# EAGLE board BATT_CPU_V3 (EAGLE 9.6.2)
REV: C
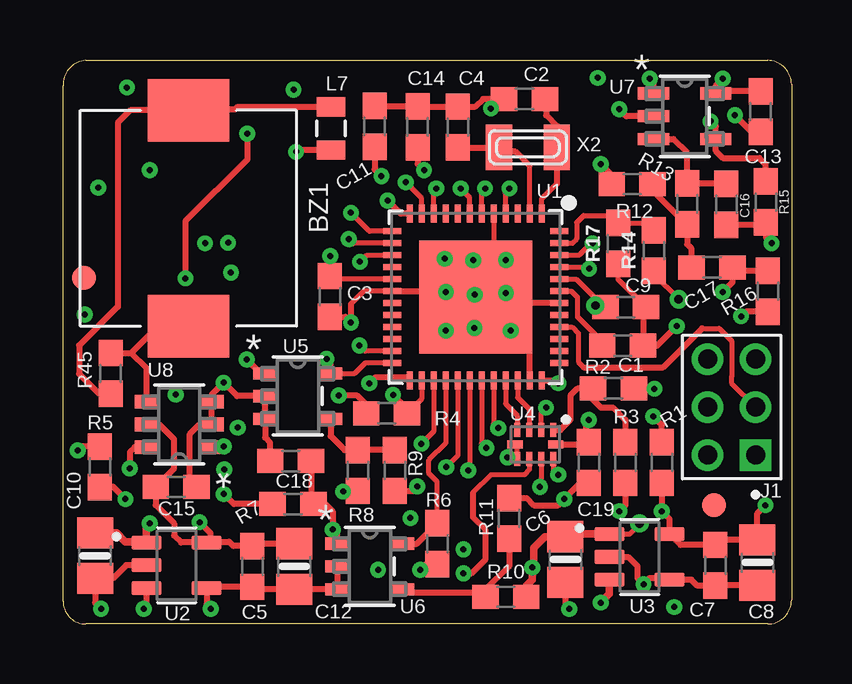
[diagram p0: board, top side]
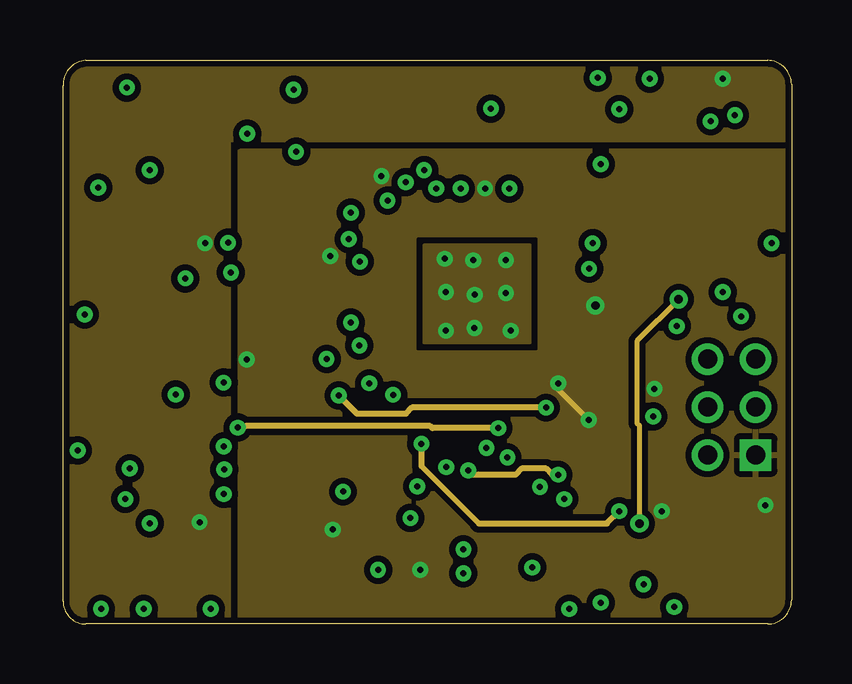
[diagram p1: board, inner layer Route2]
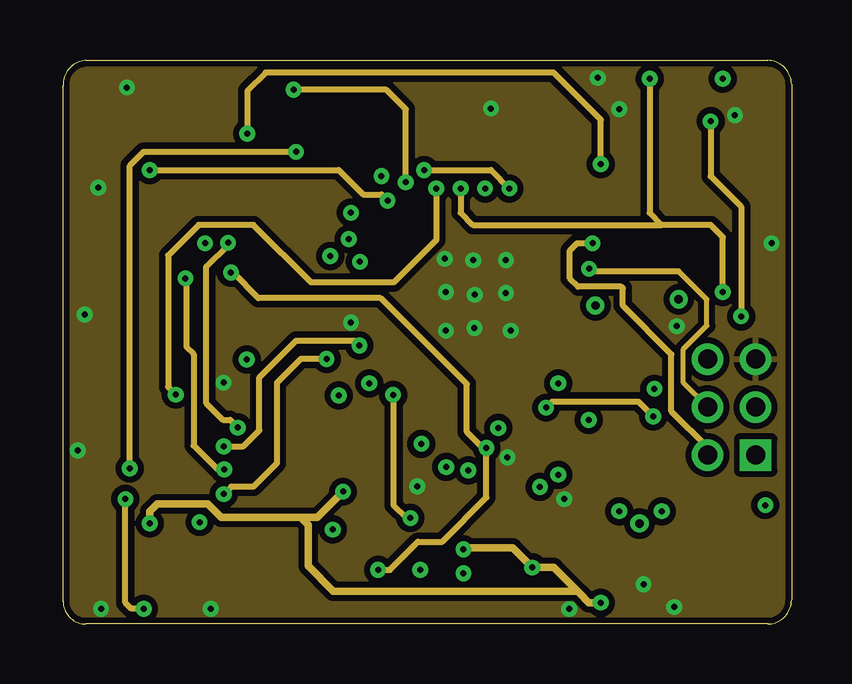
[diagram p2: board, inner layer Route15]
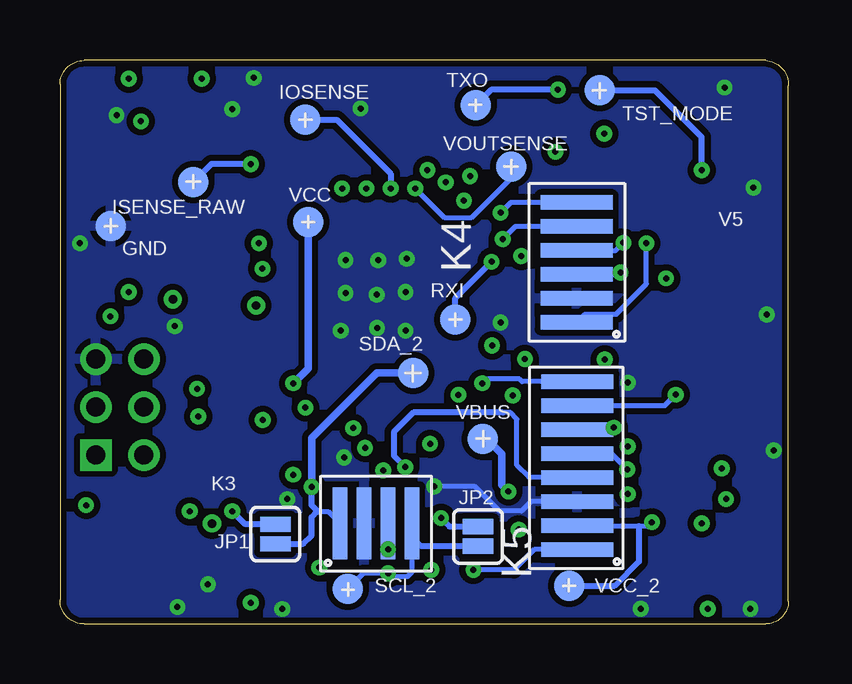
[diagram p3: board, bottom side, seen from below]

Size 30.35 x 23.5 mm. Coordinates in mm from the lower left corner, seen from the top.
Outline: 0.95,23.5 29.35,23.5 arc-90 30.35,22.5 30.35,1 arc-90 29.35,0 0.95,0 arc-90 0,0.95 0,22.45 arc-90 0.95,23.5
Copper layers (1+2*15+16): Top 0.035mm / dielectric 1.5mm / Route2 0.035mm / dielectric 0.15mm / Route15 0.035mm / dielectric 0.2mm / Bottom 0.035mm
Design rules "adafruit *": minimum track width 8mil, minimum drill 0.25mm, track to track 10mil, track to pad 10mil, pad to pad 10mil, via to via 10mil, smd to smd 8mil, copper to edge 10mil, drill to drill 8mil, minimum pad ring 10mil, minimum via ring 8mil, stop-mask expansion 2mil, vias tented up to drill 20mil, thermal gap 10mil
Net classes: 2 gnd: width 0.305 mm, drill 0.483 mm, clearance 0.203 mm

## Footprints (pad centres in the part's own frame; a part is rotated, then mirrored left to right if it is on the bottom)
PKMCS0909 = smd 2.6 x 3.4: 1 -4.5,0; 2 4.5,0
0603-NO = smd 1.1 x 1: 1 -0.85,0; 2 0.85,0
0805-NO = smd 1.3 x 1.5: 1 -0.95,0; 2 0.95,0
TESTPAD_B1,27 = smd 1.27 x 1.27: TP 0,0
TE_2314820-6 = drill 0.8 pad 1.15 square: 1 0,0 | drill 0.8 pad 1.15: 2 0,2; 3 2,0; 4 2,2; 5 4,0; 6 4,2
SMT-JUMPER_2_NO_SILK = smd 0.635 x 1.27: 1 -0.406,0; 2 0.406,0
FLEX4 = smd 0.6 x 3: 1 0.3,1.85; 2 1.3,1.85; 3 2.3,1.85; 4 3.3,1.85
FLEX6 = smd 0.6 x 3: 1 -2.5,-0.35; 2 -1.5,-0.35; 3 -0.5,-0.35; 4 0.5,-0.35; 5 1.5,-0.35; 6 2.5,-0.35
FLEX8 = smd 0.6 x 3: 1 0.8,2.05; 2 1.8,2.05; 3 2.8,2.05; 4 3.8,2.05; 5 4.8,2.05; 7 5.8,2.05; 8 6.8,2.05; 9 7.8,2.05
0805 = smd 0.8 x 1.2: 1 -0.9,0; 2 0.9,0
0603 = smd 1.1 x 1: 1 -0.85,0; 2 0.85,0
TQFN48_7MM = smd 0.25 x 0.75: 1 -2.75,-3.475; 2 -2.25,-3.475; 3 -1.75,-3.475; 4 -1.25,-3.475; 5 -0.75,-3.475; 6 -0.25,-3.475; 7 0.25,-3.475; 8 0.75,-3.475; 9 1.25,-3.475; 10 1.75,-3.475; 11 2.25,-3.475; 12 2.75,-3.475; 25 2.75,3.475; 26 2.25,3.475; 27 1.75,3.475; 28 1.25,3.475; 29 0.75,3.475; 30 0.25,3.475; 31 -0.25,3.475; 32 -0.75,3.475; 33 -1.25,3.475; 34 -1.75,3.475; 35 -2.25,3.475; 36 -2.75,3.475 | smd 0.75 x 0.25: 13 3.475,-2.75; 14 3.475,-2.25; 15 3.475,-1.75; 16 3.475,-1.25; 17 3.475,-0.75; 18 3.475,-0.25; 19 3.475,0.25; 20 3.475,0.75; 21 3.475,1.25; 22 3.475,1.75; 23 3.475,2.25; 24 3.475,2.75; 37 -3.475,2.75; 38 -3.475,2.25; 39 -3.475,1.75; 40 -3.475,1.25; 41 -3.475,0.75; 42 -3.475,0.25; 43 -3.475,-0.25; 44 -3.475,-0.75; 45 -3.475,-1.25; 46 -3.475,-1.75; 47 -3.475,-2.25; 48 -3.475,-2.75 | smd 4.7 x 4.7: THERMAL 0,0
SOT95P280X110-5N = smd 1.25 x 0.59: 1 -1.255,0.95; 2 -1.255,0; 3 -1.255,-0.95; 4 1.255,-0.95; 5 1.255,0.95
QFN-10-RSE = smd 0.58 x 0.25: 1 -0.6,0.75; 2 -0.6,0.25; 3 -0.6,-0.25; 4 -0.6,-0.75; 6 0.6,-0.75; 7 0.6,-0.25; 8 0.6,0.25; 9 0.6,0.75 | smd 0.35 x 0.63: 5 0,-0.85; 10 0,0.85
21-0057F_MXM = smd 0.972 x 0.508: 1 -1.362,0.95; 2 -1.362,0; 3 -1.362,-0.95; 4 1.362,-0.95; 5 1.362,0.95
SOT-23-5_MC_MCH = smd 1.31 x 0.508: 1 -1.295,0.95; 2 -1.295,0; 3 -1.295,-0.95; 4 1.295,-0.95; 5 1.295,0.95
DBV6 = smd 0.972 x 0.568: 1 -1.362,0.95; 2 -1.362,0; 3 -1.362,-0.95; 4 1.362,-0.95; 5 1.362,0; 6 1.362,0.95
FIDUCIAL_1MM = smd 1 x 1: 1 0,0
XTAL3215 = smd 1.1 x 1.9: P$1 1.2,0; P$2 -1.2,0

## Placement (x,y rotation side)
BZ1  PKMCS0909E4000-R1  [PKMCS0909]  5.22,16.92 270 top
C1  2.2uF  [0603-NO]  23.31,11.6 0 top
C2  22pF  [0603-NO]  19.23,21.89 180 top
C3  100n  [0603-NO]  11.12,13.66 270 top
C4  22pF  [0603-NO]  16.45,20.72 90 top
C5  100n  [0603-NO]  7.88,2.4 270 top
C6  2.2uF  [0805-NO]  20.93,2.69 270 top
C7  100n  [0603-NO]  27.18,2.45 270 top
C8  2.2uF  [0805-NO]  28.93,2.56 270 top
C9  100n  [0603-NO]  23.44,13.21 0 top
C10  2.2uF  [0805-NO]  1.33,2.85 270 top
C11  100n  [0603-NO]  12.98,20.75 90 top
C12  2.2uF  [0805-NO]  9.63,2.4 270 top
C13  100n  [0603-NO]  29.06,21.37 270 top
C14  2.2uF  [0603-NO]  14.77,20.73 90 top
C15  100n  [0603-NO]  4.71,5.71 0 top
C16  1u  [0603-NO]  27.63,17.5 270 top
C17  1u  [0603-NO]  27.04,14.86 0 top
C18  100n  [0603-NO]  9.48,6.8 180 top
C19  100n  [0603-NO]  21.9,6.73 270 top
GND  TESTPAD_TPSQB1,27  [TESTPAD_B1,27]  28.23,16.59 0 bottom
IOSENSE  TESTPAD_TPSQB1,27  [TESTPAD_B1,27]  20.12,21.03 0 bottom
ISENSE_RAW  TESTPAD_TPSQB1,27  [TESTPAD_B1,27]  24.79,18.43 0 bottom
J1  2314820-6  [TE_2314820-6]  28.85,7.05 90 top
JP1  JUMPER-SMT_2_NO_SILK  [SMT-JUMPER_2_NO_SILK]  21.38,3.75 270 bottom
JP2  JUMPER-SMT_2_NO_SILK  [SMT-JUMPER_2_NO_SILK]  12.93,3.65 270 bottom
K3  FLEX_CONN  [FLEX4]  18.98,2.35 0 bottom
K4  FLEX6  [FLEX6]  9.17,15.08 90 bottom
K5  FLEX8  [FLEX8]  6.75,2.31 90 bottom
L7  MMZ2012Y202BT000  [0805]  11.16,20.66 90 top
R1  2k2  [0603]  24.95,6.73 270 top
R2  2k2  [0603]  22.93,9.82 0 top
R3  100R  [0603]  23.42,6.73 270 top
R4  100R  [0603]  13.48,8.78 0 top
R5  100k  [0603]  1.53,6.55 270 top
R6  120k  [0603]  15.59,3.35 270 top
R7  120k  [0603]  9.58,5 0 top
R8  120k  [0603]  12.28,6.4 270 top
R9  5.6k  [0603]  13.83,6.4 270 top
R10  120k  [0603]  18.45,1.13 0 top
R11  8.2k  [0603]  18.58,4.4 90 top
R12  2.4k  [0603]  23.71,18.35 180 top
R13  62k  [0603]  26,17.52 270 top
R14  [0603]  24.62,15.57 90 top
R15  2.4k  [0603]  29.28,17.6 270 top
R16  36k  [0603]  29.36,13.88 270 top
R17  [0603]  23.13,15.87 90 top
R45  330  [0603]  1.98,10.45 90 top
RXI  TESTPAD_TPSQB1,27  [TESTPAD_B1,27]  13.88,12.7 0 bottom
SCL_2  TESTPAD_TPSQB1,27  [TESTPAD_B1,27]  18.37,1.46 0 bottom
SDA_2  TESTPAD_TPSQB1,27  [TESTPAD_B1,27]  15.64,10.46 0 bottom
TST_MODE  TESTPAD_TPSQB1,27  [TESTPAD_B1,27]  7.86,22.25 0 bottom
TXO  TESTPAD_TPSQB1,27  [TESTPAD_B1,27]  13.03,21.63 0 bottom
U1  ATSAMD21G18_QFN  [TQFN48_7MM]  17.19,13.63 180 top
U2  TPS78230DDCR  [SOT95P280X110-5N]  4.73,2.45 0 top
U3  TPS78230DDCR  [SOT95P280X110-5N]  24.02,2.8 0 top
U4  TS3USB221A  [QFN-10-RSE]  19.68,7.49 270 top
U5  MAX9062EUK+T  [21-0057F_MXM]  9.78,9.5 0 top
U6  MAX9062EUK+T  [21-0057F_MXM]  12.78,2.4 0 top
U7  MCP6071T-E/OT  [SOT-23-5_MC_MCH]  25.9,21.17 0 top
U8  SN74LVC1G19DBVR  [DBV6]  4.84,8.32 180 top
U$34  FIDUCIAL""  [FIDUCIAL_1MM]  27.12,4.96 90 top
U$35  FIDUCIAL""  [FIDUCIAL_1MM]  0.87,14.43 0 top
VBUS  TESTPAD_TPSQB1,27  [TESTPAD_B1,27]  12.73,7.73 0 bottom
VCC  TESTPAD_TPSQB1,27  [TESTPAD_B1,27]  20.01,16.75 0 bottom
VCC_2  TESTPAD_TPSQB1,27  [TESTPAD_B1,27]  9.14,1.6 0 bottom
VOUTSENSE  TESTPAD_TPSQB1,27  [TESTPAD_B1,27]  11.55,19.08 0 bottom
X2  32.768  [XTAL3215]  19.37,19.88 0 top

## Library data of the parts
BZ1 = buzzer
C1-C7 C9-C19 U1 = microbuilder
C8 = microbuilder; COMPANY: ADAFRUIT INDUSTRIES; DRAWN: KTOWN; REV: A
GND IOSENSE ISENSE_RAW RXI SCL_2 SDA_2 TST_MODE TXO VBUS VCC VCC_2 VOUTSENSE = BeagleBone_Blue_R3
J1 = connector 2x3-2mm; COMMENT: 2314820-6; DESCRIPTION: Socket Receptacle 6P,2MM,B-B,REC,DRVT,2.7,0.1AU,TB 6 POS; DIGI-KEY_PART_NUMBER: 17-2314820-6-ND; MF: TE Connectivity; MP: 2314820-6; PACKAGE: None; PURCHASE-URL: https://pricing.snapeda.com/search/part/2314820-6/?ref=eda
JP1 JP2 = SparkFun-Jumpers
K3-K5 = Flex_3mm
L7 = SparkFun
R1-R17 R45 = SparkFun-Resistors
U2 U3 = TPS78230DDCR; AVAILABILITY: Good; DESCRIPTION: 150-mA, nano-IQ, low-dropout voltage regulator with enable from -40C to +125C 5-SOT-23-THIN -40 to 125; MF: Texas Instruments; MP: TPS78230DDCR; PACKAGE: SOT-23-THN-5 Texas Instruments; PRICE: None; PURCHASE-URL: https://pricing.snapeda.com/search/part/TPS78230DDCR/?ref=eda
U4 = SparkFun-IC-Special-Function; PROD_ID: IC-12115
U5 U6 = MAX9062; BUILT_BY: EMA_UL_Team; MANUFACTURER_PART_NUMBER: MAX9062EUK+T; SOURCELIBRARY: Maxim_2014-06-20; VENDOR: Maxim Integrated Products
U7 = MCP6071; BUILT_BY: EMA_Jessica; COPYRIGHT: Copyright (C) 2018 Accelerated Designs. All rights reserved; MANUFACTURER_PART_NUMBER: MCP6071T-E/OT; SOURCELIBRARY: Microchip_2019-08-23_21; VENDOR: Microchip
U8 = SN74LVC1G19DBVR; DATASHEET_URL: http://www.ti.com/lit/gpn/SN74LVC1G19; DESCRIPTION: 1-of-2 Decoder/Demultiplexer; FAMILY_NAME: LL Decoder, Mux/Demux; GENERIC_PART_NUMBER: SN74LVC1G19; INDUSTRY_STD_PKG_TYPE: SOT-23; MANUFACTURER: Texas Instruments; MANUFACTURER_PART_NUMBER: SN74LVC1G19DBVR; PACKAGE_DESIGNATOR: DBV; PIN_COUNT: 6; VENDOR: Texas Instruments
U$34 U$35 = microbuilder; BOM: EXCLUDE
X2 = adafruit2

## Nets
!RESET: J1.3 U1.40
#EN_DCDC: K5.9 U1.25
/FLAG_BATTLOW: R6.1 U1.28 U6.5
A0: U1.3
A2: U1.8
A3: U1.9
AREF: C14.1 U1.4
BUZZER: U1.23 U8.1
D0: U1.16
D+: U1.34 U4.3
D-: U1.33 U4.4
EN_VCC2: R5.2 U2.3
FLAG_CHRG: R7.1 U1.24 U5.5
GND: C1.2 C2.2 C3.2 C4.2 C5.2 C6.2 C7.2 C8.2 C9.2 C10.2 C11.2 C12.2 C13.2 C14.2 C15.2 C16.2 C18.2 C19.2 GND.TP J1.5 K3.2 K4.2 K5.3 R5.1 R9.2 R11.2 R15.2 R17.1 U1.5 U1.18 U1.35 U1.42 U1.THERMAL U2.2 U2.4 U3.2 U3.4 U4.5 U4.6 U5.2 U5.3 U6.2 U6.3 U7.2 U8.2 U8.3
IOSENSE: C17.2 IOSENSE.TP R16.1 U1.7 U7.1
ISENSE_RAW: ISENSE_RAW.TP K5.5 R12.2
MISO: U1.21
MOSI: U1.19
N$1: R15.1 R16.2 U7.4
N$2: R2.1 R3.1 U4.1
N$3: R1.1 R4.1 U4.2
N$5: C2.1 U1.1 X2.P$1
N$7: C4.1 U1.2 X2.P$2
N$8: C17.1 R12.1 R13.2
N$10: R10.1 R11.1 U6.4
N$11: R8.1 R9.1 U5.4
N$13: C16.1 R13.1 U7.3
N$17: L7.1 U8.6
N$19: BZ1.1 L7.2 R45.1
N$22: BZ1.2 R45.2 U8.4
OP_SWITCH: K5.4 U1.29
RXI: RXI.TP U1.15
S_DOWN: K4.6 U1.13
S_UP: K4.5 U1.14
SCK: U1.20
SCL: K4.4 K5.7 U1.32
SCL2_CPU: JP2.1 R4.2 U1.26
SCL_2: JP2.2 K3.4 SCL_2.TP U4.7
SDA: K4.3 K5.1 U1.31
SDA2_CPU: JP1.1 R3.2 U1.27
SDA_2: JP1.2 K3.1 SDA_2.TP U4.8
SWCLK: J1.4 U1.45
SWDIO: J1.2 U1.46
TST_MODE: TST_MODE.TP U1.12
TXO: TXO.TP U1.11
USB_SEL: U1.30 U4.9
VBUS: C6.1 C10.1 K3.3 R8.2 R10.2 R14.1 U2.1 U3.1 U3.3 VBUS.TP
VCC: C3.1 C7.1 C8.1 C9.1 C11.1 C18.1 C19.1 J1.1 R1.2 R2.2 R6.2 R7.2 U1.6 U1.17 U1.36 U1.44 U3.5 U4.10 U5.1 U6.1 VCC.TP
VCC_2: C5.1 C12.1 C13.1 C15.1 K4.1 K5.2 U2.5 U7.5 U8.5 VCC_2.TP
VDDCORE: C1.1 U1.43
VINSENSE: R14.2 R17.2 U1.47
VOUTSENSE: K5.8 U1.10 VOUTSENSE.TP

## Tracks (layer width: path | path; a pad name or v marks a point on that pad's centre or on a via)
!RESET
  Top 0.203: J1.3 27.84,10.06 27.84,10.29 27.85,10.3 27.85,11.8 27.34,12.32 26.62,12.32 | U1.40 21.21,12.38 21.47,12.12 21.47,10.93 21.69,10.71
  Top 0.254: 21.69,10.71 25.01,10.71 26.62,12.32
#EN_DCDC  (via drill 0.25)
  Top 0.254: U1.25 14.42,10.15 14.28,10.29 13.01,10.29 v12.76,10.04
  Bottom 0.203: K5.9 11.1,10.11 11.2,10.21 12.58,10.21 v12.76,10.04
/FLAG_BATTLOW
  Top 0.203: R6.1 15.59,5.93 15.25,6.28 15.25,6.84 15.94,7.53 U1.28
  Top 0.254: U6.5 14.74,3.35 R6.1
AREF  (via drill 0.25)
  Top 0.203: U1.4 18.44,18.01
  Top 0.254: 18.44,18.01 v18.6,18.16 | C14.1 14.77,19.19 v15.04,18.93
  Route15 0.254: v15.04,18.93 17.84,18.93 v18.6,18.16
BUZZER  (via drill 0.25)
  Top 0.203: U1.23 12.58,11.38 v12.35,11.61
  Top 0.254: U8.1 6.66,7.37 v6.7,7.41
  Route15 0.254: v6.7,7.41 7.52,7.41 8.18,8.07 8.18,10.29 9.71,11.81 12.14,11.81 v12.35,11.61
D+
  Top 0.203: U1.34 18.94,9.44 19.42,8.96 19.42,8.19 19.43,8.18 U4.3
D-
  Top 0.203: U1.33 18.44,9.18 18.92,8.7 U4.4
EN_VCC2  (via drill 0.25)
  Top 0.254: U2.3 3.47,0.76 v3.36,0.64 | R5.2 1.55,5.72 2.09,5.72 v2.6,5.21
  Route15 0.254: v3.36,0.64 2.85,0.64 2.6,0.89 v2.6,5.21
FLAG_CHRG  (via drill 0.25)
  Top 0.203: U1.24 12.58,10.88 12.15,10.45 U5.5
  Top 0.254: U5.5 11.14,10.89 v10.98,11.05 | R7.1 7.11,5 v6.7,5.42
  Route15 0.254: v10.98,11.05 9.91,11.05 8.91,10.06 8.91,6.7 7.93,5.72 7,5.72 v6.7,5.42
GND  (via drill 0.25)
  Top 0.203: U1.18 12.53,13.88 11.99,13.34 | U1.5 17.94,14.38 | U4.6 18.93,7.39 | C9.2 23.13,14.37 R17.1
  Top 0.254: C15.2 5.28,5.99 5.28,7.92 5.68,8.32 U8.2 U8.3 6.2,9.58 v6.69,10.06 v6.69,10.07 7.25,9.5 U5.2 U5.3 8.42,7.77 8.63,7.56 C18.2 | C8.2 27.19,1.61 C7.2 26.42,1.6 26.17,1.85 U3.4 25.26,1.85 25.2,1.91 24.44,1.91 v24.19,1.65 23.93,1.91 23.93,2.42 23.55,2.8 U3.2 | C6.2 20.93,0.78 v21.09,0.63 | U6.2 U6.3 C12.2 7.98,1.45 C5.2 6.03,1.55 U2.4 5.98,0.81 v6.15,0.64 | v1.58,0.64 1.33,0.89 C10.2 2.09,1.91 2.63,2.45 U2.2 | R5.1 0.67,7.4 0.61,7.34 v0.61,7.24 | U1.18 16.94,13.88 U1.THERMAL | C3.2 11.76,12.81 v11.99,12.58 11.99,13.34 | U1.35 19.44,11.38 U1.THERMAL | U1.42 17.44,13.38 U1.THERMAL | 17.94,14.38 U1.THERMAL | U7.2 23.47,21.17 v23.17,21.47 | C11.2 14.75,21.6 C14.2 C4.2 17.18,21.57 17.5,21.89 C2.2 18.22,21.89 v17.83,21.5 | v29.52,15.88 29.28,16.12 R15.2 29.18,16.65 C16.2 | C13.2 28.82,20.52 28.76,20.45 v28,21.21 | 18.93,7.39 U4.5 | U4.6 18.93,6.91 18.85,6.99 18.55,6.99 v18.51,6.95 | C19.2 21.56,5.88 v20.88,5.21 20.63,4.96 19.61,4.96 19.32,5.25 R11.2 | v25.57,12.42 24.75,11.6 C1.2 24.16,13.08 C9.2 | R9.2 14.57,5.55 v14.76,5.74
  Bottom 0.203: K5.3 10.72,5.11 11.12,4.71 12.04,4.71 13.07,5.74 v14.76,5.74
  other vias: 15.9,15.23 18.45,15.18 18.65,12.23 15.95,12.23 15.95,13.84 17.14,12.34 18.45,13.8 17.15,13.73 17.09,15.17 22.28,22.77 25.46,0.71 0.9,12.9 1.46,18.2 2.66,22.37
  pour Bottom: -0.76,23.65 30.42,23.65 30.42,0.08 -0.76,0.08
  pour Route2: 15.04,15.84 19.46,15.84 19.46,11.69 15.03,11.69 15.03,15.83
  pour Route15 (isolate 0.254, rank 2): -0.34,23.82 -0.9,23.26 -0.9,-0.81 30.7,-0.81 30.7,24.14 -0.34,24.14
IOSENSE  (via drill 0.25)
  Top 0.203: U1.7 16.94,17.79 v16.57,18.16
  Top 0.254: R16.1 28.02,14.73 C17.2 27.89,14.25 v27.49,13.85 | U7.1 24.6,22.57 v24.44,22.74
  Route15 0.254: v27.49,13.85 27.49,16.13 26.98,16.64 24.95,16.64 | v24.44,22.74 24.44,17.15 24.95,16.64 | v16.57,18.16 16.57,17.15 17.07,16.64 24.95,16.64
  Bottom 0.254: IOSENSE.TP 18.82,21.03 16.57,18.77 v16.57,18.17 v16.57,18.16
ISENSE_RAW  (via drill 0.25)
  Top 0.254: R12.2 22.86,18.73 v22.41,19.18 | v7.68,20.45 7.68,19.37 5.1,16.79 v5.1,14.41
  Route15 0.254: v22.41,19.18 22.41,21.02 20.44,22.99 8.44,22.99 7.68,22.23 v7.68,20.45 | v5.1,14.41 5.14,14.38 5.14,11.56 5.44,11.25 5.44,7.44 6.44,6.45 v6.72,6.45
  Bottom 0.203: v6.72,6.45 7.38,7.11 K5.5
  Bottom 0.254: v22.41,19.18 24.05,19.18 ISENSE_RAW.TP
N$1  (via drill 0.25)
  Top 0.254: R15.1 29.27,18.46 29.27,19.18 29.01,19.43 27.49,19.43 27.19,19.73 U7.4 27.19,20.74 v26.98,20.96 | R16.2 28.45,13.03 v28.25,12.83
  Route15 0.254: v26.98,20.96 26.98,18.67 28.25,17.4 v28.25,12.83
N$2
  Top 0.254: R3.1 23.42,8.51 22.92,9.02 22.41,9.02 22.08,9.34 R2.1 21.43,9.82 21.14,9.53 21.14,8.51 20.72,8.09 U4.1
N$3  (via drill 0.25)
  Top 0.203: U4.2 19.93,8.83 v20.12,9.02
  Top 0.254: R4.1 12.63,9.15 12.25,9.53 v11.49,9.53 | R1.1 24.95,8.3 v24.59,8.66
  Route2 0.254: v20.12,9.02 14.53,9.02 14.28,8.77 12.25,8.77 v11.49,9.53
  Route15 0.254: v20.12,9.02 20.38,9.27 23.97,9.27 v24.59,8.66
N$5
  Top 0.203: U1.1 19.94,17.73 20.57,18.36
  Top 0.254: 20.57,18.36 X2.P$1 20.57,20.76 20.12,21.21 20.12,21.97 20.08,21.93 C2.1
N$7
  Top 0.203: U1.2 19.44,19.1
  Top 0.254: 19.44,19.1 18.85,19.69 18.36,19.69 X2.P$2 C4.1
N$8
  Top 0.254: C17.1 26.19,15.65 26,15.84 R13.2 25.96,16.67 24.56,18.07 R12.1
N$10
  Top 0.254: R11.1 18.58,2.4 17.6,1.42 R10.1 | R10.1 | R10.1 17.43,1.3 14.29,1.3 U6.4
N$11
  Top 0.254: R9.1 R8.1 11.73,7.25 11.14,7.84 U5.4
N$13
  Top 0.254: C16.1 27.61,18.37 R13.1 26,19.65 25.43,20.22 U7.3
N$17  (via drill 0.25)
  Top 0.254: L7.1 9.78,19.76 v9.71,19.69 | U8.6 2.98,7.37 2.78,7.17 v2.78,6.49
  Route15 0.254: v9.71,19.69 3.36,19.69 2.78,19.11 v2.78,6.49
N$19
  Top 0.254: L7.2 7.26,21.56 7.17,21.47 5.39,21.47 5.34,21.42 BZ1.1 2.8,21.42 2.28,20.9 2.28,13.23 0.67,11.62 0.67,10.44 1.51,9.6 R45.1
N$22
  Top 0.254: R45.2 2.84,11.3 | BZ1.2 3.96,12.42 2.84,11.3 | U8.4 3.48,10.67 2.84,11.3
OP_SWITCH  (via drill 0.25)
  Top 0.203: U1.29 16.44,7.01 v15.97,6.54
  Bottom 0.203: K5.4 10.8,6.11 11.31,6.62 11.31,8.55 11.58,8.82 11.89,8.82
  Bottom 0.254: 11.89,8.82 15.63,8.82 16.44,8 16.44,7.01 v15.97,6.54
RXI  (via drill 0.25)
  Top 0.203: U1.15 13.69,15.36 12.62,15.36 v12.37,15.11
  Bottom 0.254: RXI.TP 13.88,13.6 v12.37,15.11
S_DOWN  (via drill 0.25)
  Top 0.203: U1.13 12.76,16.38 v11.99,17.15
  Bottom 0.203: K4.6 11.56,17.58 v11.99,17.15
S_UP  (via drill 0.25)
  Top 0.203: U1.14 12.08,15.88
  Top 0.254: v11.91,16.05 12.08,15.88
  Bottom 0.203: v11.91,16.05 11.38,16.58 K4.5
SCL  (via drill 0.25)
  Top 0.203: U1.32 17.94,8.36 v18.13,8.17
  Route2 0.203: 7.61,8.26 7.35,8.26 v7.28,8.19
  Route2 0.254: v18.13,8.17 15.39,8.17 15.3,8.26 7.61,8.26
  Route15 0.254: v6.87,15.9 6.87,15.81 5.97,14.91 5.97,9.2 6.66,8.51 6.96,8.51 v7.28,8.19
  Bottom 0.203: K4.4 7.19,15.58 v6.87,15.9 | K5.7 8.65,7.96 7.51,7.96 v7.28,8.19
SCL2_CPU  (via drill 0.25)
  Top 0.203: U1.26 14.94,9.39 R4.2
  Top 0.254: R4.2 14.33,8.98 v13.75,9.56
  Route15 0.254: v14.47,4.42 14.31,4.42 13.77,4.96 13.77,9.54 v13.75,9.56
  Bottom 0.254: JP2.1 14.11,4.06 v14.47,4.42
SCL_2  (via drill 0.25)
  Top 0.203: U4.7 19.43,6.44 19.22,6.23 17.84,6.23 17.07,5.46
  Top 0.254: 17.07,5.46 17.07,4.45 17.58,3.94 17.58,2.67 17.03,2.12 v16.68,2.12
  Bottom 0.203: SCL_2.TP 17.71,2.12 v16.68,2.12 16.55,1.99 15.87,1.99 15.68,2.18 K3.4 15.68,3.62 15.31,3.24
  Bottom 0.254: JP2.2 15.31,3.24
SDA  (via drill 0.25)
  Top 0.203: U1.31 17.44,7.55 v17.64,7.34
  Route15 0.254: v13.12,2.26 13.61,2.26 14.79,3.43 15.8,3.43 17.64,5.27 v17.64,7.34 17.48,7.34 16.82,8 16.82,10.01 13.23,13.59 8.14,13.59 7.08,14.65 v6.99,14.65
  Bottom 0.203: K4.3 7.06,14.58 v6.99,14.65 | K5.1 10.59,3.11 11.44,2.26 v13.12,2.26
SDA2_CPU  (via drill 0.25)
  Top 0.203: U1.27 15.44,8.02 v14.93,7.52
  Top 0.254: R3.2 23.42,4.96 v23.17,4.7
  Route2 0.203: 14.93,6.59 17.33,4.19
  Route2 0.254: v14.93,7.52 14.93,6.59 | 17.33,4.19 22.66,4.19 v23.17,4.7
  Bottom 0.254: v23.17,4.7 22.62,4.16 JP1.1
SDA_2  (via drill 0.25)
  Top 0.203: v19.87,5.72 19.93,5.78 U4.8
  Bottom 0.203: K3.1 19.15,4.67 19.65,4.67
  Bottom 0.254: JP1.2 20.21,3.34 19.87,3.69 19.87,4.45 19.65,4.67 19.65,4.73 19.87,4.96 v19.87,5.72
  Bottom 0.305: v19.87,5.72 19.87,7.75 17.16,10.46 SDA_2.TP
SWCLK  (via drill 0.25)
  Top 0.203: v21.92,14.81 21.9,14.83 21.9,14.85 21.86,14.88 U1.45
  Route15 0.203: J1.4 25.84,10.06 25.84,11.46 26.82,12.44 26.82,13.53 25.65,14.7
  Route15 0.254: 25.65,14.7 22.03,14.7 v21.92,14.81
SWDIO  (via drill 0.25)
  Top 0.203: U1.46 21.5,15.38 22,15.88 v22.06,15.88
  Route15 0.254: J1.2 26.85,7.37 25.35,8.87 25.35,11.24 23.32,13.27 23.32,14 23.25,14.07 21.46,14.07 21.12,14.41 21.12,15.57 21.42,15.88 v22.06,15.88
TST_MODE  (via drill 0.25)
  Top 0.254: U1.12 14.07,17.1 v13.52,17.66
  Route15 0.254: v3.61,18.93 11.49,18.93 12.5,17.91 13.26,17.91 v13.52,17.66
  Bottom 0.254: TST_MODE.TP 5.56,22.25 3.61,20.3 v3.61,18.93
TXO  (via drill 0.25)
  Top 0.203: U1.11 14.94,17.76 v14.28,18.42
  Route15 0.254: v14.28,18.42 14.28,21.47 13.47,22.28 v9.6,22.28
  Bottom 0.254: TXO.TP 12.39,22.28 v9.6,22.28
USB_SEL  (via drill 0.25)
  Top 0.203: U1.30 16.94,6.47 | U4.9 20.43,6.43 v20.63,6.23
  Top 0.254: 16.94,6.47 v16.88,6.41
  Route2 0.254: v20.63,6.23 20.38,6.23 20.12,6.48 19.11,6.48 18.85,6.23 17.06,6.23 v16.88,6.41
VBUS  (via drill 0.25, 0.35)
  Top 0.203: U3.1 23.61,3.75 24.02,4.16 v24.02,4.19 | v25.65,13.54 v25.65,13.55 24.62,14.58 R14.1
  Top 0.254: 3.44,3.43 U2.1 | 21.04,3.75 C6.1
  Top 0.305: C10.1 2.23,3.8 2.6,3.43 3.44,3.43 | U3.1 21.04,3.75 | R10.2 19.3,1.59 19.55,1.84 v19.55,2.36 19.61,2.42 19.61,3.18 20.08,3.64 C6.1 | U2.1 3.47,4.06 v3.61,4.19 | R8.2 11.69,5.55 v11.66,5.52 | U3.3 22.76,1.25 v22.41,0.89
  Route2 0.203: v24.02,4.19 24.02,8.26 23.91,8.37 23.91,11.8 v25.65,13.54
  Route15 0.254: 21.52,1.27 21.42,1.37
  Route15 0.305: v3.61,4.19 3.61,4.7 3.92,5.01 6.02,5.01 6.58,4.45 9.91,4.45 | 9.91,4.45 10.59,4.45 v11.66,5.52 | v22.41,0.89 21.9,0.89 21.52,1.27 20.44,2.36 v19.55,2.36 18.73,3.18 16.75,3.18 v16.68,3.11 | 21.42,1.37 11.26,1.37 10.22,2.42 10.22,4.14 9.91,4.45
  Bottom 0.203: K3.3 16.68,3.17 16.65,3.14
  Bottom 0.254: 12.7,7.75 VBUS.TP
  Bottom 0.305: 16.65,3.14 v16.68,3.11 | 12.7,7.75 12.59,7.75 11.94,7.09 11.94,5.79 v11.66,5.52
VCC  (via drill 0.25, 0.35)
  Top 0.203: U1.17 11.25,14.38 | U1.44 21.37,14.38 22.54,13.21 C9.1 22.25,13.21 v22.18,13.28 | U1.6 17.44,18.02
  Top 0.254: v29.27,4.96 28.93,4.62 C8.1 27.39,3.51 C7.1 25.72,3.3 U3.5 25.27,4.38 v24.95,4.7 R1.2 | v11.13,15.34 v11.12,15.33 C3.1 11.25,14.38 | U5.1 8.23,10.45 v7.65,11.03 | C18.1 10.33,5.1 R7.2 10.93,5 11.23,4.7 v11.23,3.94 11.42,3.75 U6.1 | R6.2 15.12,2.5 v14.88,2.26 | C11.1 12.98,18.96 v13.26,18.67 | 17.44,18.02 v17.58,18.16 | v21.9,8.51 21.8,8.41 21.8,7.48 21.81,7.49 | U4.10 21.81,7.49 | 21.81,7.49 C19.1 | R2.2 24.63,9.82 v24.64,9.81 | U1.36 20.51,10.15 v20.63,10.04
  Route2 0.203: v21.9,8.51 20.63,9.78 v20.63,10.04
  Bottom 0.305: v20.63,10.04 20.01,10.66 VCC.TP
  pour Route2 (rank 2): 30.63,19.69 7.37,19.69 7.37,-0.48 30.63,-0.48
VCC_2  (via drill 0.25)
  Top 0.203: U8.5 4.01,8.32
  Top 0.254: 4.01,8.32 4.63,7.7 4.63,6.48 C15.1 3.86,4.96 4.63,4.19 4.63,3.69 4.91,3.4 U2.5 6.12,3.4 6.15,3.43 | 6.15,3.43 6.91,3.43 7.1,3.25 C5.1 7.98,3.35 C12.1 | 6.15,3.43 6.15,3.78 v5.69,4.25 | C13.1 27.29,22.22 U7.5 27.19,22.44 v27.49,22.74
  Bottom 0.203: K4.1 8.48,12.92 7.17,12.92 5.92,14.18 v5.92,15.87 | K5.2 8.78,4.09 6.26,4.09 5.85,4.09
  Bottom 0.254: 6.26,4.09 6.23,4.09 6.23,2.61 7.24,1.6 VCC_2.TP | 5.85,4.09 v5.69,4.25
  pour Route2 (rank 2): 6.86,-0.12 -0.49,-0.12 -0.49,23.75 30.28,23.75 30.28,20.2 6.86,20.2
VDDCORE
  Top 0.203: U1.43 21.18,13.88 21.43,13.62 21.43,12.81 22.46,11.78 C1.1
VINSENSE
  Top 0.203: U1.47 21.22,15.88 21.4,16.06 21.4,16.74 21.69,17.03 22.82,17.03 R17.2 24.32,16.72 R14.2
VOUTSENSE  (via drill 0.25)
  Top 0.203: U1.10 15.44,18.05
  Top 0.254: 15.44,18.05 v15.55,18.16
  Route15 0.254: v15.55,18.16 15.55,16.02 13.77,14.24 10.33,14.24 7.93,16.64 5.64,16.64 4.37,15.37 4.37,9.88 v4.69,9.57
  Bottom 0.203: VOUTSENSE.TP 11.55,18.6 13.22,16.93 14.32,16.93 v15.55,18.16 | K5.8 5.15,9.11 v4.69,9.57

## Text on the board
bNames: V5